# EAGLE board daughter-double (EAGLE 6.6.0)
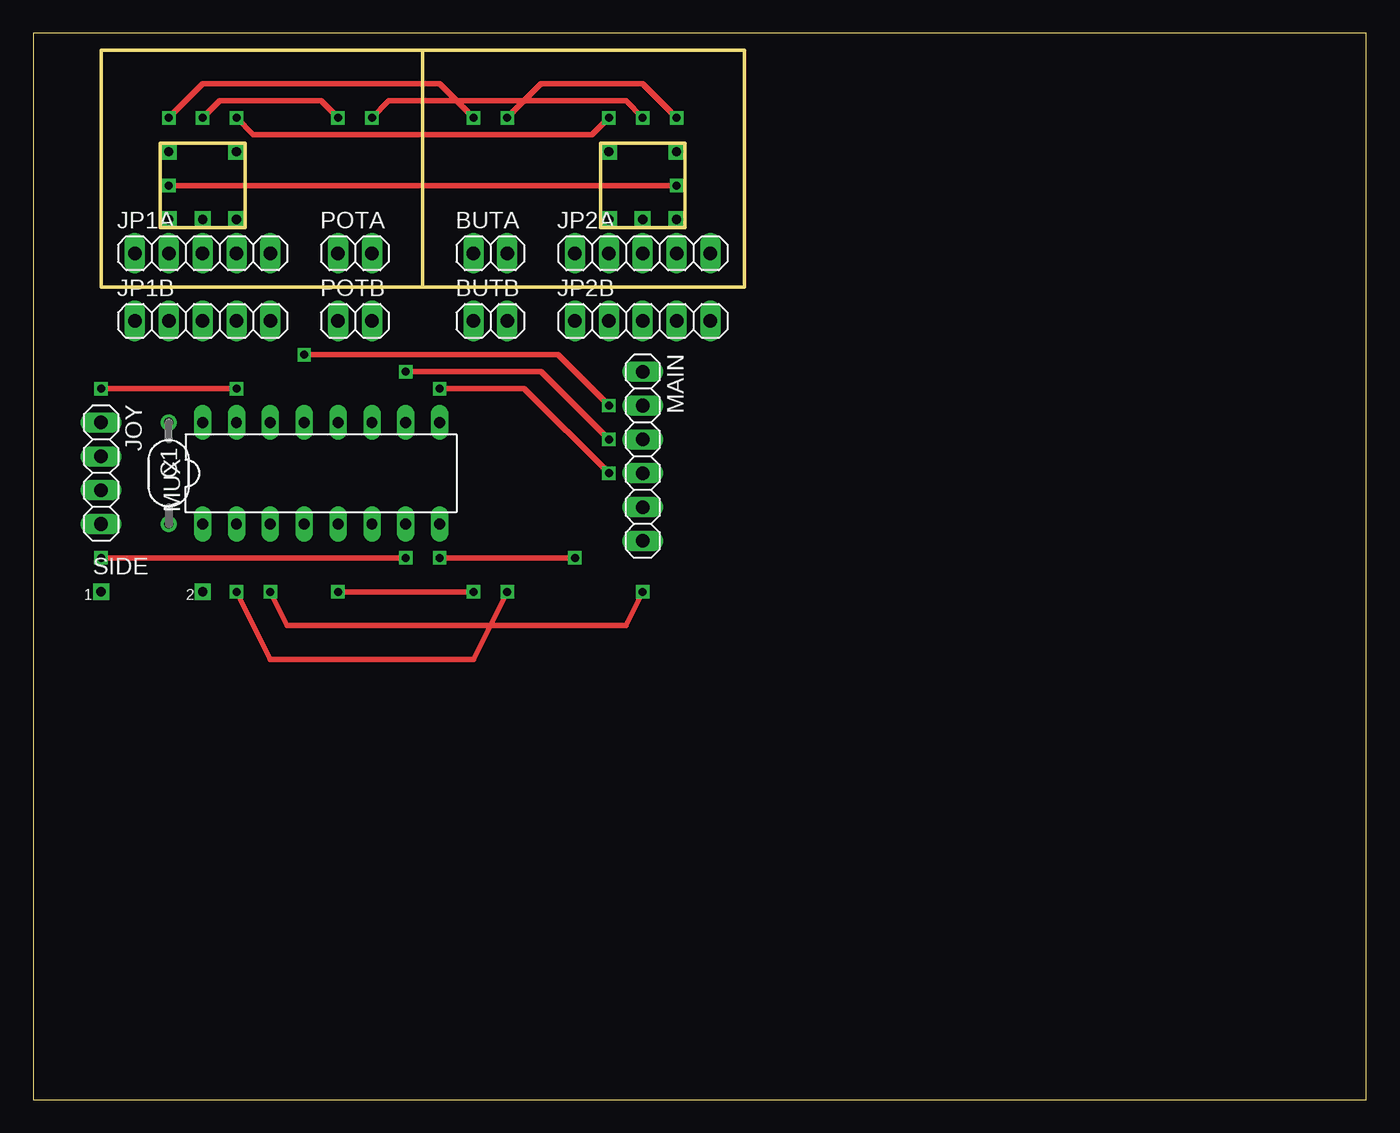
[diagram p0: board, top side]
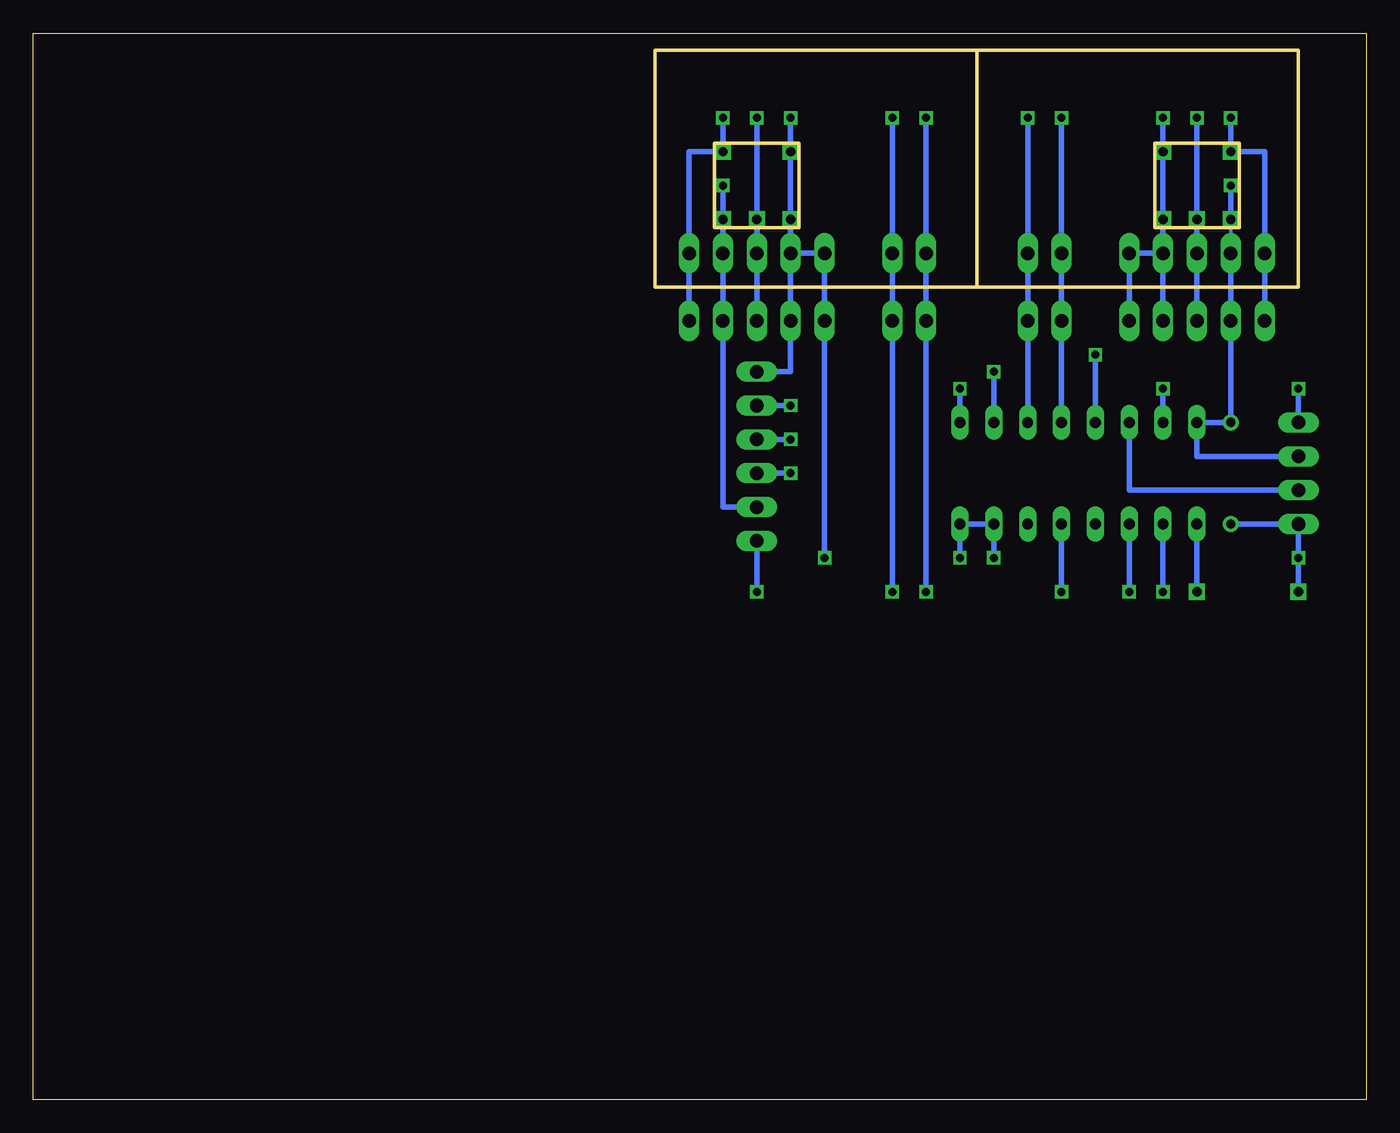
[diagram p1: board, bottom side, seen from below]

Size 100 x 80 mm. Coordinates in mm from the lower left corner, seen from the top.
Outline: 29.21,60.96 5.08,60.96 5.08,78.74 29.21,78.74
Outline: 29.21,60.96 53.34,60.96 53.34,78.74 29.21,78.74
Outline: 29.21,78.74 29.21,60.96
Outline: 0,0 100,0 100,80 0,80 0,0
Outline: 9.53,71.75 9.53,65.41 15.88,65.41 15.88,71.75 9.53,71.75
Outline: 42.55,71.75 48.9,71.75 48.9,65.41 42.55,65.41 42.55,71.75
Copper layers (1*16): Top 0.035mm / dielectric 1.5mm / Bottom 0.035mm
Design rules "default": minimum track width 10mil, minimum drill 24mil, track to track 8mil, track to pad 8mil, pad to pad 8mil, via to via 8mil, smd to smd 8mil, copper to edge 40mil, drill to drill 8mil, minimum pad ring 10mil, minimum via ring 8mil, stop-mask expansion 4mil, vias tented up to drill 0mil, thermal gap 10mil

## Footprints (pad centres in the part's own frame; a part is rotated, then mirrored left to right if it is on the bottom)
SWPOT = drill 0.7 square: POT_A -2.54,0; POT_B 2.54,0; POT_W 0,0; SW_A -2.54,-5.08; SW_B 2.54,-5.08
1X02 = drill 1.016 long: 1 -1.27,0; 2 1.27,0
050X030_050_3 = drill 0.7: 1 -3.81,0; 2 3.81,0
1X04 = drill 1.016 long: 1 -3.81,0; 2 -1.27,0; 3 1.27,0; 4 3.81,0
1X05 = drill 1.016 long: 1 -5.08,0; 2 -2.54,0; 3 0,0; 4 2.54,0; 5 5.08,0
1X06 = drill 1.016 long: 1 -6.35,0; 2 -3.81,0; 3 -1.27,0; 4 1.27,0; 5 3.81,0; 6 6.35,0
DIL16 = drill 0.813 long: 1 -8.89,-3.81; 2 -6.35,-3.81; 3 -3.81,-3.81; 4 -1.27,-3.81; 5 1.27,-3.81; 6 3.81,-3.81; 7 6.35,-3.81; 8 8.89,-3.81; 9 8.89,3.81; 10 6.35,3.81; 11 3.81,3.81; 12 1.27,3.81; 13 -1.27,3.81; 14 -3.81,3.81; 15 -6.35,3.81; 16 -8.89,3.81
SPST2 = drill 0.7 square: 1 0,-2.54; 2 7.62,-2.54

## Placement (x,y rotation side)
BACK1  SWPOT  [SWPOT]  45.72,66.04 180 top
BUTA  [1X02]  34.29,63.5 0 top
BUTB  [1X02]  34.29,58.42 0 top
C1  100n  [050X030_050_3]  10.16,46.99 270 top
JOY  [1X04]  5.08,46.99 270 top
JP1A  [1X05]  12.7,63.5 0 top
JP1B  [1X05]  12.7,58.42 0 top
JP2A  [1X05]  45.72,63.5 0 top
JP2B  [1X05]  45.72,58.42 0 top
MAIN  [1X06]  45.72,48.26 270 top
MUX  4052N  [DIL16]  21.59,46.99 0 top
POTA  [1X02]  24.13,63.5 0 top
POTB  [1X02]  24.13,58.42 0 top
SELECT1  SWPOT  [SWPOT]  12.7,66.04 180 top
SIDE  MOMENTARY  [SPST2]  5.08,40.64 0 top

## Library data of the parts
BACK1 SELECT1 = jaapie
BUTA BUTB JOY JP1A JP1B JP2A JP2B MAIN POTA POTB = pinhead
C1 = gm-caps-ceramic
MUX = 40xx
SIDE = gm-switches

## Nets
A: MAIN.4 MUX.9
B: MAIN.3 MUX.10
BSIDE: MUX.1 SIDE.2
BUTTA: BUTA.1 BUTB.1 JP1A.1 JP1B.1 MUX.5 SELECT1.SW_B
BUTTB: BACK1.SW_A BUTA.2 BUTB.2 JP2A.5 JP2B.5 MUX.2
BUTTONS: MAIN.6 MUX.3
GND: BACK1.POT_B BACK1.SW_B C1.2 JOY.4 JP1A.4 JP1A.5 JP1B.4 JP1B.5 JP2A.1 JP2A.2 JP2B.1 JP2B.2 MAIN.1 MUX.7 MUX.8 SELECT1.POT_A SELECT1.SW_A SIDE.1
POTA: JP1A.3 JP1B.3 MUX.12 POTA.1 POTB.1 SELECT1.POT_W
POTB: BACK1.POT_W JP2A.3 JP2B.3 MUX.11 POTA.2 POTB.2
POTS: MAIN.2 MUX.13
VA: BACK1.POT_A C1.1 JOY.2 JP1A.2 JP1B.2 JP2A.4 JP2B.4 MAIN.5 MUX.16 SELECT1.POT_B
X: JOY.1 MUX.15
Y: JOY.3 MUX.14

## Tracks (layer width: path | path; a pad name or v marks a point on that pad's centre or on a via)
A  (via drill 0.6)
  Top 0.406: v30.48,53.34 36.83,53.34 v43.18,46.99
  Bottom 0.406: MUX.9 v30.48,53.34 | v43.18,46.99 MAIN.4
B  (via drill 0.6)
  Top 0.406: v27.94,54.61 38.1,54.61 v43.18,49.53
  Bottom 0.406: MUX.10 v27.94,54.61 | v43.18,49.53 MAIN.3
BSIDE
  Bottom 0.406: MUX.1 SIDE.2
BUTTA  (via drill 0.6)
  Top 0.406: v33.02,38.1 v22.86,38.1 | v10.16,73.66 12.7,76.2 30.48,76.2 v33.02,73.66
  Bottom 0.406: v33.02,38.1 BUTB.1 BUTA.1 v33.02,73.66 | v22.86,38.1 MUX.5 | v10.16,73.66 SELECT1.SW_B 7.62,71.12 JP1A.1 JP1B.1
BUTTB  (via drill 0.6)
  Top 0.406: v35.56,38.1 33.02,33.02 17.78,33.02 v15.24,38.1 | v35.56,73.66 38.1,76.2 45.72,76.2 v48.26,73.66
  Bottom 0.406: v35.56,38.1 BUTB.2 BUTA.2 v35.56,73.66 | v15.24,38.1 MUX.2 | v48.26,73.66 BACK1.SW_A 50.8,71.12 JP2A.5 JP2B.5
BUTTONS  (via drill 0.6)
  Top 0.406: v17.78,38.1 19.05,35.56 44.45,35.56 v45.72,38.1
  Bottom 0.406: MUX.3 v17.78,38.1 | v45.72,38.1 MAIN.6
GND  (via drill 0.6)
  Top 0.406: v15.24,73.66 16.51,72.39 41.91,72.39 v43.18,73.66 | v5.08,40.64 v27.94,40.64 | v40.64,40.64 v30.48,40.64
  Bottom 0.406: SELECT1.SW_A SELECT1.POT_A JP1A.4 | JP2A.2 BACK1.POT_B BACK1.SW_B v43.18,73.66 | JP1A.4 JP1A.5 JP1B.5 | JP1A.4 SELECT1.SW_A | SELECT1.SW_A v15.24,73.66 | JP2A.2 JP2A.1 JP2B.1 v40.64,40.64 | JP2A.2 JP2B.2 43.18,54.61 MAIN.1 | JP1B.4 JP1A.4 | v27.94,40.64 MUX.7 MUX.8 v30.48,40.64 | SIDE.1 v5.08,40.64 JOY.4 C1.2
POTA  (via drill 0.6)
  Top 0.406: v12.7,73.66 13.97,74.93 21.59,74.93 v22.86,73.66
  Bottom 0.406: MUX.12 POTB.1 POTA.1 v22.86,73.66 | JP1A.3 SELECT1.POT_W | JP1A.3 v12.7,73.66 | JP1A.3 JP1B.3
POTB  (via drill 0.6)
  Top 0.406: v25.4,73.66 26.67,74.93 44.45,74.93 v45.72,73.66
  Bottom 0.406: MUX.11 POTB.2 POTA.2 v25.4,73.66 | v45.72,73.66 BACK1.POT_W JP2A.3 JP2B.3
POTS  (via drill 0.6)
  Top 0.406: v43.18,52.07 39.37,55.88 v20.32,55.88
  Bottom 0.406: MAIN.2 v43.18,52.07 | v20.32,55.88 MUX.13
VA  (via drill 0.6)
  Top 0.406: v10.16,68.58 v48.26,68.58
  Bottom 0.254: JP1A.2 SELECT1.POT_B
  Bottom 0.406: SELECT1.POT_B v10.16,68.58 | v48.26,68.58 BACK1.POT_A JP2A.4 JP2B.4 48.26,44.45 MAIN.5 | JP1A.2 JP1B.2 C1.1 MUX.16 12.7,48.26 JOY.2
X  (via drill 0.6)
  Top 0.406: v5.08,53.34 v15.24,53.34
  Bottom 0.406: JOY.1 v5.08,53.34 | v15.24,53.34 MUX.15
Y
  Bottom 0.406: JOY.3 17.78,45.72 MUX.14